# EAGLE board 14077-gatorBytes_button_board-Panel (EAGLE 9.1.0)
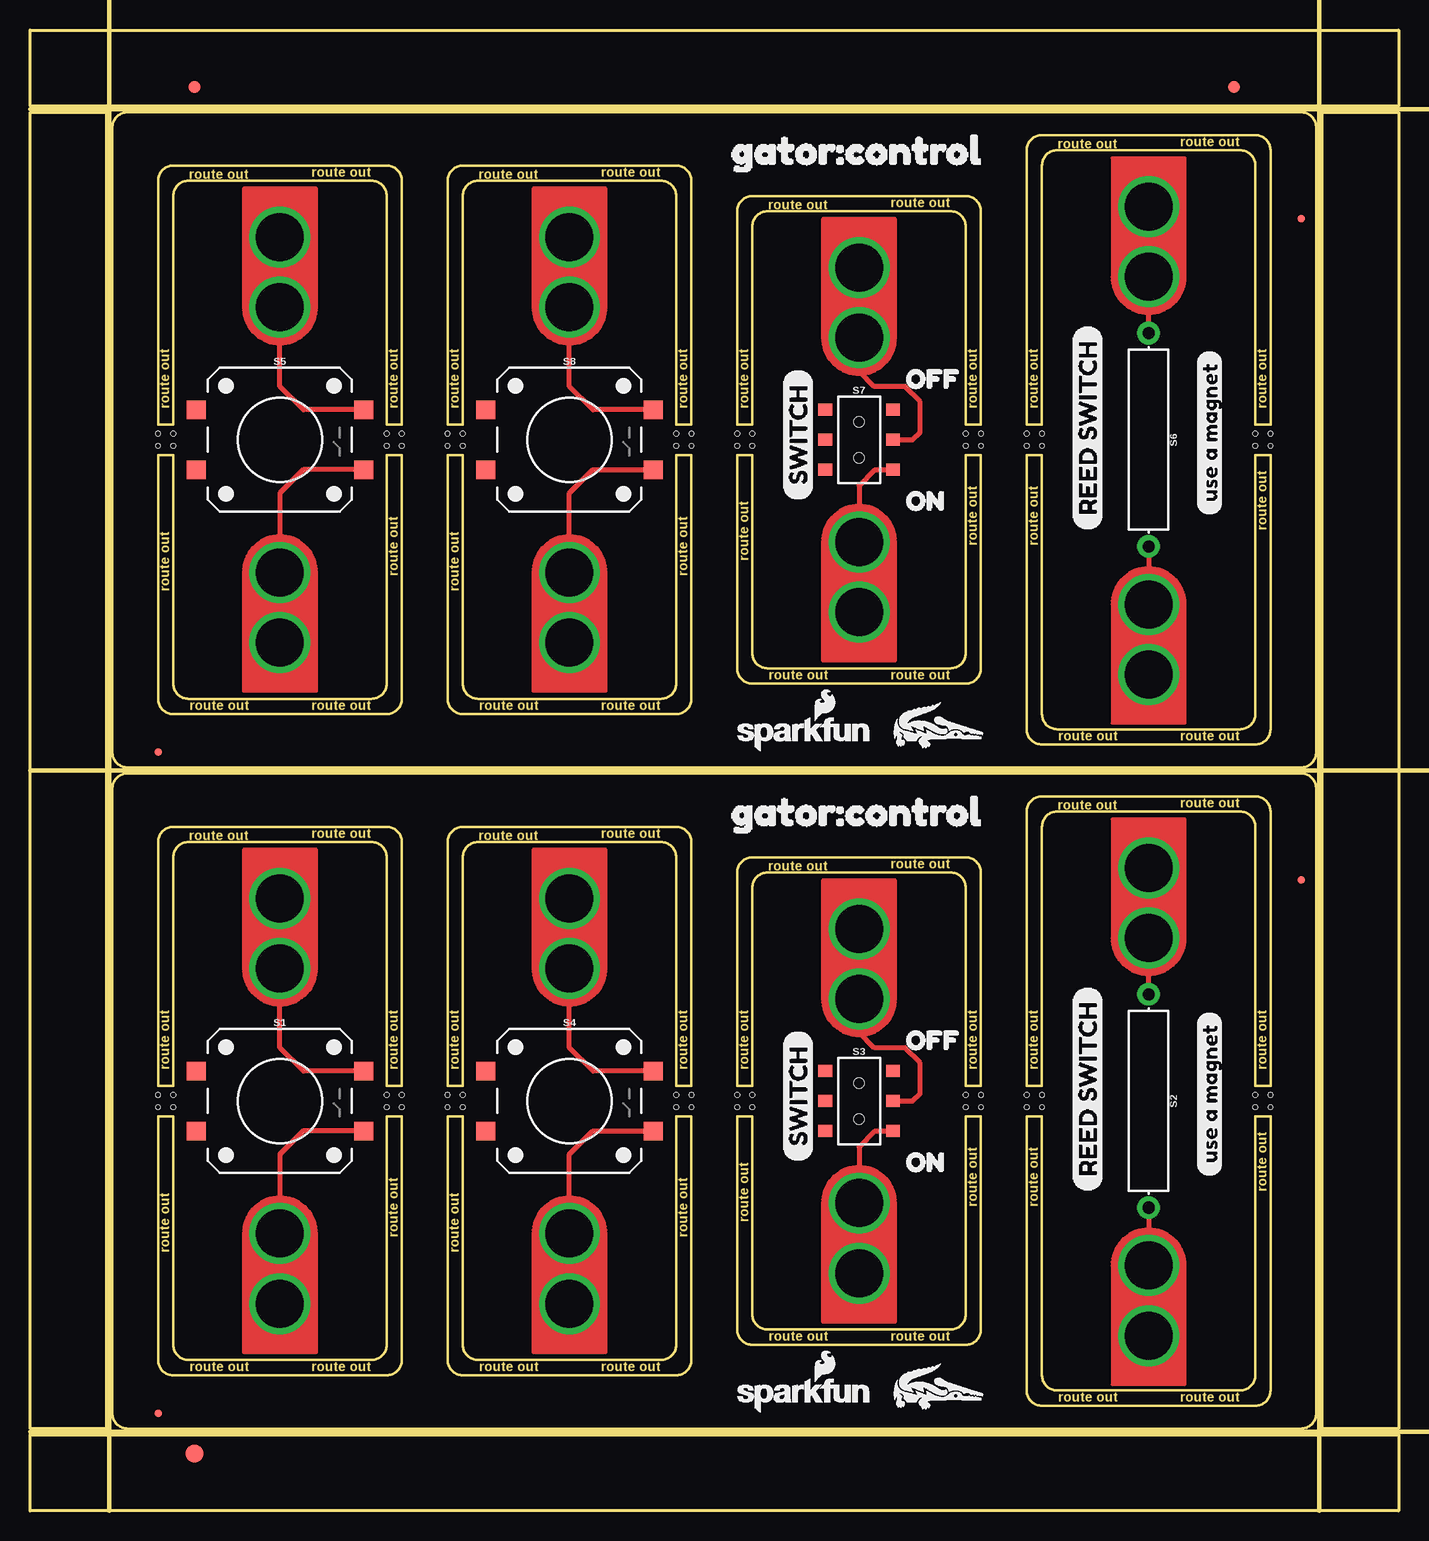
[diagram p0: board, top side]
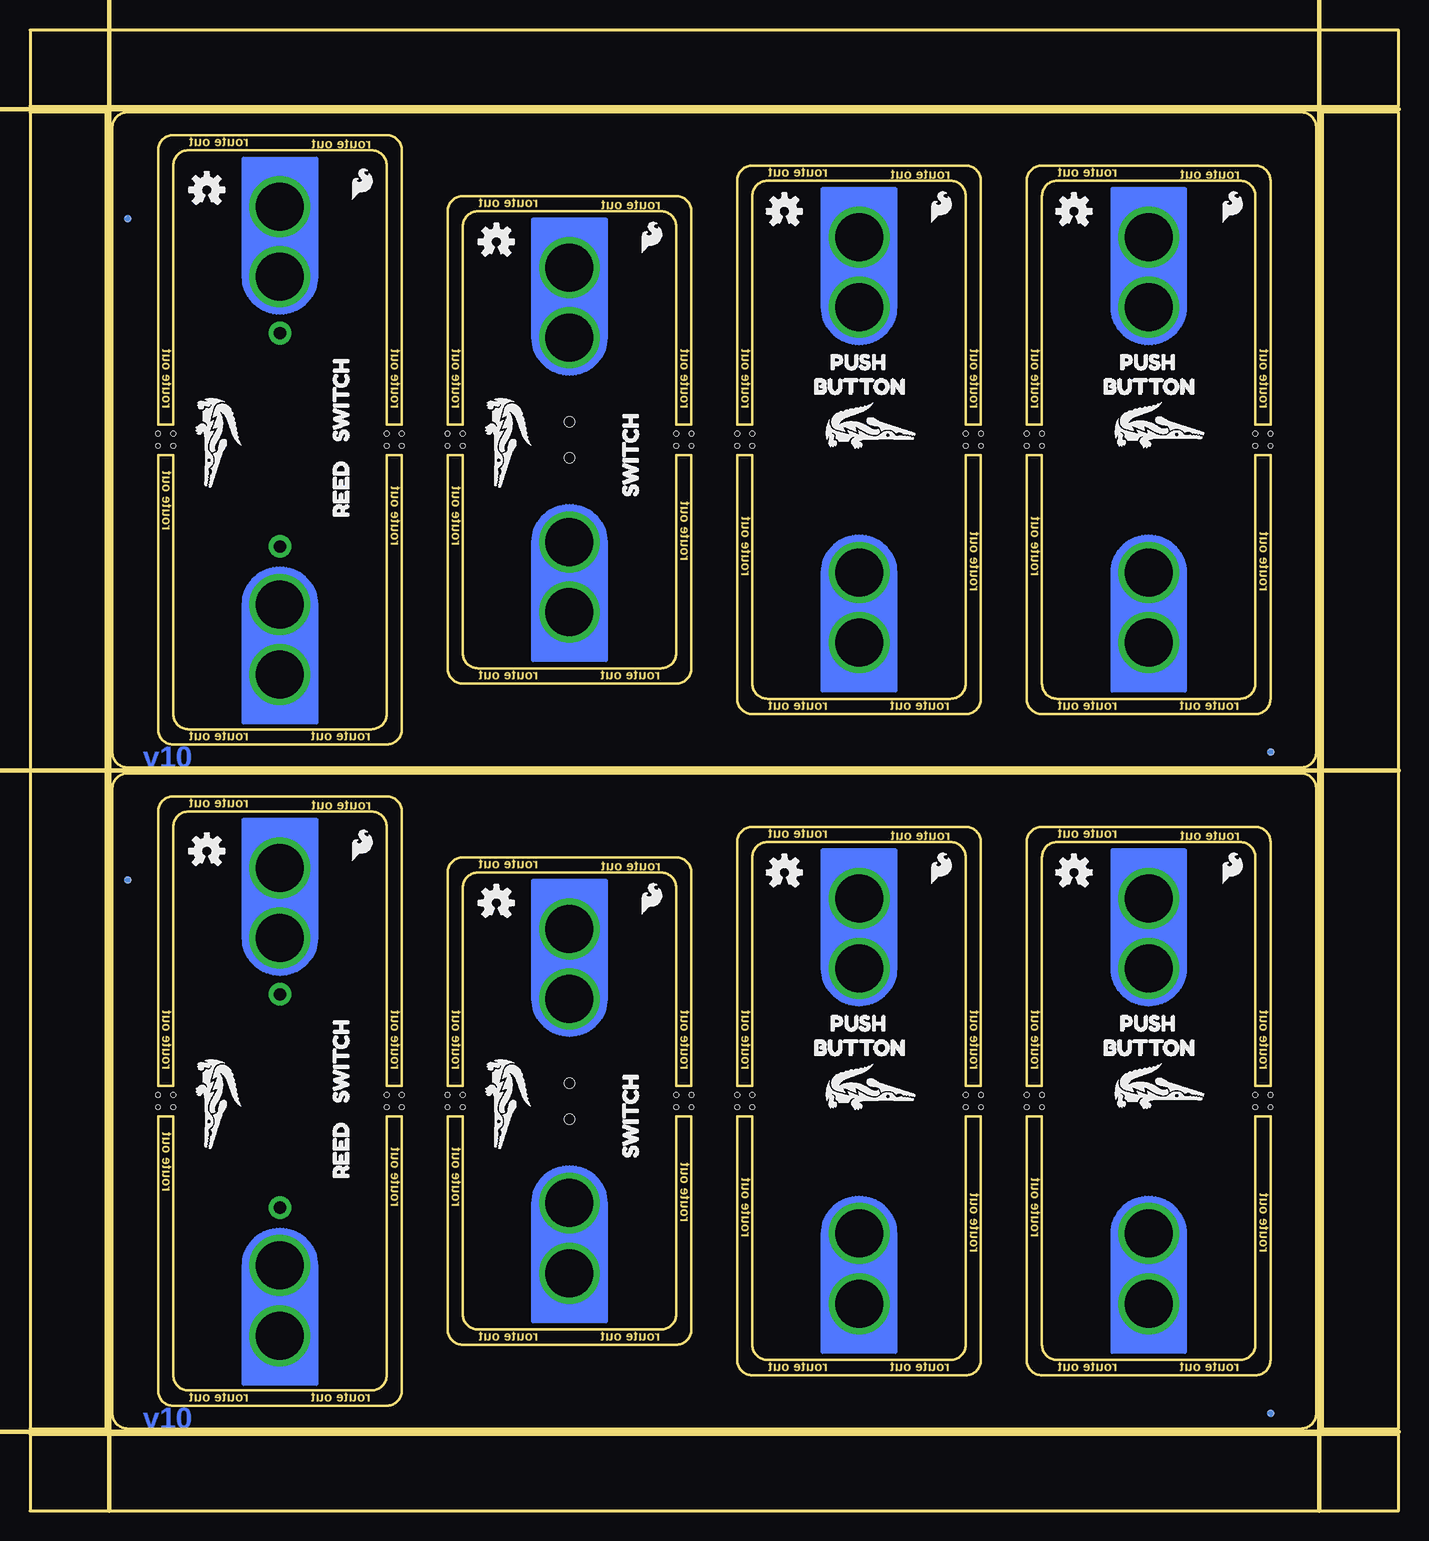
[diagram p1: board, bottom side, seen from below]

Size 114.05 x 123.44 mm. Coordinates in mm from the lower left corner, seen from the top.
Outline: 8.13,6.86 arc-90 6.86,8.13 6.86,60.2 arc-90 8.13,61.47 105.92,61.47 arc-90 107.19,60.2 107.19,8.13 arc-90 105.92,6.86 8.13,6.86
Outline: 28.45,55.75 arc-90 29.72,54.48 29.72,35.43 30.99,35.43 30.99,55.75 arc90 29.72,57.02 11.94,57.02 arc90 10.67,55.75 10.67,35.43 11.94,35.43 11.94,54.48 arc-90 13.21,55.75 28.45,55.75
Outline: 29.72,13.84 arc-90 28.45,12.57 13.21,12.57 arc-90 11.94,13.84 11.94,32.89 10.67,32.89 10.67,12.57 arc90 11.94,11.3 29.72,11.3 arc90 30.99,12.57 30.99,32.89 29.72,32.89 29.72,13.84
Outline: 52.58,55.75 arc-90 53.85,54.48 53.85,35.43 55.12,35.43 55.12,55.75 arc90 53.85,57.02 36.07,57.02 arc90 34.8,55.75 34.8,35.43 36.07,35.43 36.07,54.48 arc-90 37.34,55.75 52.58,55.75
Outline: 53.85,13.84 arc-90 52.58,12.57 37.34,12.57 arc-90 36.07,13.84 36.07,32.89 34.8,32.89 34.8,12.57 arc90 36.07,11.3 53.85,11.3 arc90 55.12,12.57 55.12,32.89 53.85,32.89 53.85,13.84
Outline: 76.71,53.21 arc-90 77.98,51.94 77.98,35.43 79.25,35.43 79.25,53.21 arc90 77.98,54.48 60.2,54.48 arc90 58.93,53.21 58.93,35.43 60.2,35.43 60.2,51.94 arc-90 61.47,53.21 76.71,53.21
Outline: 77.98,16.38 arc-90 76.71,15.11 61.47,15.11 arc-90 60.2,16.38 60.2,32.89 58.93,32.89 58.93,15.11 arc90 60.2,13.84 77.98,13.84 arc90 79.25,15.11 79.25,32.89 77.98,32.89 77.98,16.38
Outline: 100.84,58.29 arc-90 102.11,57.02 102.11,35.43 103.38,35.43 103.38,58.29 arc90 102.11,59.56 84.33,59.56 arc90 83.06,58.29 83.06,35.43 84.33,35.43 84.33,57.02 arc-90 85.6,58.29 100.84,58.29
Outline: 102.11,11.3 arc-90 100.84,10.03 85.6,10.03 arc-90 84.33,11.3 84.33,32.89 83.06,32.89 83.06,10.03 arc90 84.33,8.76 102.11,8.76 arc90 103.38,10.03 103.38,32.89 102.11,32.89 102.11,11.3
Outline: 8.13,61.98 arc-90 6.86,63.25 6.86,115.32 arc-90 8.13,116.59 105.92,116.59 arc-90 107.19,115.32 107.19,63.25 arc-90 105.92,61.98 8.13,61.98
Outline: 28.45,110.87 arc-90 29.72,109.6 29.72,90.55 30.99,90.55 30.99,110.87 arc90 29.72,112.14 11.94,112.14 arc90 10.67,110.87 10.67,90.55 11.94,90.55 11.94,109.6 arc-90 13.21,110.87 28.45,110.87
Outline: 29.72,68.96 arc-90 28.45,67.69 13.21,67.69 arc-90 11.94,68.96 11.94,88.01 10.67,88.01 10.67,67.69 arc90 11.94,66.42 29.72,66.42 arc90 30.99,67.69 30.99,88.01 29.72,88.01 29.72,68.96
Outline: 52.58,110.87 arc-90 53.85,109.6 53.85,90.55 55.12,90.55 55.12,110.87 arc90 53.85,112.14 36.07,112.14 arc90 34.8,110.87 34.8,90.55 36.07,90.55 36.07,109.6 arc-90 37.34,110.87 52.58,110.87
Outline: 53.85,68.96 arc-90 52.58,67.69 37.34,67.69 arc-90 36.07,68.96 36.07,88.01 34.8,88.01 34.8,67.69 arc90 36.07,66.42 53.85,66.42 arc90 55.12,67.69 55.12,88.01 53.85,88.01 53.85,68.96
Outline: 76.71,108.33 arc-90 77.98,107.06 77.98,90.55 79.25,90.55 79.25,108.33 arc90 77.98,109.6 60.2,109.6 arc90 58.93,108.33 58.93,90.55 60.2,90.55 60.2,107.06 arc-90 61.47,108.33 76.71,108.33
Outline: 77.98,71.5 arc-90 76.71,70.23 61.47,70.23 arc-90 60.2,71.5 60.2,88.01 58.93,88.01 58.93,70.23 arc90 60.2,68.96 77.98,68.96 arc90 79.25,70.23 79.25,88.01 77.98,88.01 77.98,71.5
Outline: 100.84,113.41 arc-90 102.11,112.14 102.11,90.55 103.38,90.55 103.38,113.41 arc90 102.11,114.68 84.33,114.68 arc90 83.06,113.41 83.06,90.55 84.33,90.55 84.33,112.14 arc-90 85.6,113.41 100.84,113.41
Outline: 102.11,66.42 arc-90 100.84,65.15 85.6,65.15 arc-90 84.33,66.42 84.33,88.01 83.06,88.01 83.06,65.15 arc90 84.33,63.88 102.11,63.88 arc90 103.38,65.15 103.38,88.01 102.11,88.01 102.11,66.42
Outline: 0,6.35 114.05,6.35 114.05,0 0,0 0,6.35
Outline: 107.7,116.59 114.05,116.59 114.05,6.86 107.7,6.86 107.7,116.59
Outline: 0,123.44 114.05,123.44 114.05,117.09 0,117.09 0,123.44
Outline: 0,116.59 6.35,116.59 6.35,6.86 0,6.86 0,116.59
Copper layers (1*16): Top 0.035mm / dielectric 1.5mm / Bottom 0.035mm
Design rules "SparkFun-2-layer-PCBWay-LIMIT": minimum track width 6mil, minimum drill 0.3mm, track to track 6mil, track to pad 6mil, pad to pad 6mil, via to via 6mil, smd to smd 6mil, copper to edge 6mil, drill to drill 6mil, minimum pad ring 6mil, minimum via ring 6mil, stop-mask expansion 4mil, vias tented up to drill 25mil, thermal gap 10mil
Holes 0.38 mm at 102.11,34.67 102.11,33.66 84.33,33.66 84.33,34.67 60.2,33.66 60.2,34.67 53.85,33.66 53.85,34.67 36.07,33.66 36.07,34.67 29.72,33.66 29.72,34.67 11.94,33.66 11.94,34.67 34.8,34.67 34.8,33.66 30.99,34.67 30.99,33.66 10.67,34.67 10.67,33.66 55.12,34.67 55.12,33.66 58.93,34.67 58.93,33.66 83.06,34.67 79.25,34.67 77.98,34.67 83.06,33.66 79.25,33.66 77.98,33.66 103.38,34.67 103.38,33.66 102.11,89.79 102.11,88.77 84.33,88.77 84.33,89.79 60.2,88.77 60.2,89.79 53.85,88.77 53.85,89.79 36.07,88.77 36.07,89.79 29.72,88.77 29.72,89.79 11.94,88.77 11.94,89.79 34.8,89.79 34.8,88.77 30.99,89.79 30.99,88.77 10.67,89.79 10.67,88.77 55.12,89.79 55.12,88.77 58.93,89.79 58.93,88.77 83.06,89.79 79.25,89.79 77.98,89.79 83.06,88.77 79.25,88.77 77.98,88.77 103.38,89.79 103.38,88.77
Milling: 5 lines

## Footprints (pad centres in the part's own frame; a part is rotated, then mirrored left to right if it is on the bottom)
FIDUCIAL-1X2 = smd 1 x 1: 1 0,0
FIDUCIAL-1.5X3 = smd 1.5 x 1.5: 1 0,0
FIDUCIAL-MICRO = smd 0.635 x 0.635: 1 0,0
TACTILE_SWITCH_SMD_12MM = smd 1.6 x 1.55: 1 6.975,-2.5; 2 -6.975,-2.5; 3 6.975,2.5; 4 -6.975,2.5
REED_SWITCH_PLASTIC = drill 1.016 pad 1.88: P$1 -8.89,0; P$2 8.89,0
SWITCH_DPDT_SMD_AYZ0202 = smd 1 x 1.15: 1 -2.5,2.825; 2 0,2.825; 3 2.5,2.825; 4 -2.5,-2.825; 5 0,-2.825; 6 2.5,-2.825 | hole 0.85: 1.5,0; -1.5,0
GATOR = drill 4 pad 5.08: P$1 0,-6.096; P$2 0,-0.254

## Placement (x,y rotation side)
E$1  [FIDUCIAL-1X2]  13.72,118.68 0 top
E$2  [FIDUCIAL-1X2]  100.33,118.68 0 top
E$3  [FIDUCIAL-1.5X3]  13.72,4.76 0 top
FD1  FIDUCIALUFIDUCIAL  [FIDUCIAL-MICRO]  105.92,52.58 0 top
FD2  FIDUCIALUFIDUCIAL  [FIDUCIAL-MICRO]  105.92,52.58 0 bottom
FD3  FIDUCIALUFIDUCIAL  [FIDUCIAL-MICRO]  10.67,8.13 0 bottom
FD4  FIDUCIALUFIDUCIAL  [FIDUCIAL-MICRO]  10.67,8.13 0 top
FD5  FIDUCIALUFIDUCIAL  [FIDUCIAL-MICRO]  105.92,107.7 0 top
FD6  FIDUCIALUFIDUCIAL  [FIDUCIAL-MICRO]  105.92,107.7 0 bottom
FD7  FIDUCIALUFIDUCIAL  [FIDUCIAL-MICRO]  10.67,63.25 0 bottom
FD8  FIDUCIALUFIDUCIAL  [FIDUCIAL-MICRO]  10.67,63.25 0 top
LOGO1  SFE_LOGO_FLAME.1_INCH  [SFE_LOGO_FLAME_.1]  63.37,49.4 0 bottom
LOGO2  OSHW-LOGOS  [OSHW-LOGO-S]  75.18,50.67 0 bottom
LOGO3  OSHW-LOGOS  [OSHW-LOGO-S]  51.18,53.21 0 bottom
LOGO4  SFE_LOGO_FLAME.1_INCH  [SFE_LOGO_FLAME_.1]  39.24,51.94 0 bottom
LOGO5  OSHW-LOGOS  [OSHW-LOGO-S]  27.05,53.21 0 bottom
LOGO6  SFE_LOGO_FLAME.1_INCH  [SFE_LOGO_FLAME_.1]  14.99,51.94 0 bottom
LOGO7  SFE_LOGO_FLAME.1_INCH  [SFE_LOGO_FLAME_.1]  87.5,53.85 0 bottom
LOGO8  OSHW-LOGOS  [OSHW-LOGO-S]  99.31,54.99 0 bottom
LOGO9  SFE_LOGO_FLAME.1_INCH  [SFE_LOGO_FLAME_.1]  63.37,104.52 0 bottom
LOGO10  OSHW-LOGOS  [OSHW-LOGO-S]  75.18,105.79 0 bottom
LOGO11  OSHW-LOGOS  [OSHW-LOGO-S]  51.18,108.33 0 bottom
LOGO12  SFE_LOGO_FLAME.1_INCH  [SFE_LOGO_FLAME_.1]  39.24,107.06 0 bottom
LOGO13  OSHW-LOGOS  [OSHW-LOGO-S]  27.05,108.33 0 bottom
LOGO14  SFE_LOGO_FLAME.1_INCH  [SFE_LOGO_FLAME_.1]  14.99,107.06 0 bottom
LOGO15  SFE_LOGO_FLAME.1_INCH  [SFE_LOGO_FLAME_.1]  87.5,108.97 0 bottom
LOGO16  OSHW-LOGOS  [OSHW-LOGO-S]  99.31,110.11 0 bottom
S1  MOMENTARY-SWITCH-SPST-SMD-12MM  [TACTILE_SWITCH_SMD_12MM]  20.83,34.16 0 top
S2  REED_SWITCH-PTH-INSULATED  [REED_SWITCH_PLASTIC]  93.22,34.16 270 top
S3  [SWITCH_DPDT_SMD_AYZ0202]  69.09,34.16 270 top
S4  MOMENTARY-SWITCH-SPST-SMD-12MM  [TACTILE_SWITCH_SMD_12MM]  44.96,34.16 0 top
S5  MOMENTARY-SWITCH-SPST-SMD-12MM  [TACTILE_SWITCH_SMD_12MM]  20.83,89.28 0 top
S6  REED_SWITCH-PTH-INSULATED  [REED_SWITCH_PLASTIC]  93.22,89.28 270 top
S7  [SWITCH_DPDT_SMD_AYZ0202]  69.09,89.28 270 top
S8  MOMENTARY-SWITCH-SPST-SMD-12MM  [TACTILE_SWITCH_SMD_12MM]  44.96,89.28 0 top
U$1  [GATOR#PNG]  98.23,34.23 270 bottom
U$2  [BUTTON3]  25.78,38.61 0 bottom
U$3  [PUSH4]  24.38,40.64 0 bottom
U$4  [PUSH4]  48.51,40.64 0 bottom
U$5  [BUTTON3]  49.91,38.61 0 bottom
U$6  [OFF9]  71.63,39.24 0 top
U$7  [REED_SWITCH0]  88.14,26.54 90 top
U$8  [SWITCH2]  64.01,29.08 90 top
U$9  [USE_A_MAGNET10]  98.3,27.81 90 top
U$10  GATOR  [GATOR]  44.96,44.96 180 top
U$11  GATOR  [GATOR]  20.83,44.96 180 top
U$12  GATOR  [GATOR]  93.22,20.7 0 top
U$13  [ON8]  71.63,29.08 0 top
U$14  GATOR  [GATOR]  69.09,25.91 0 top
U$15  GATOR  [GATOR]  69.09,42.42 180 top
U$16  GATOR  [GATOR]  93.22,47.5 180 top
U$17  GATOR  [GATOR]  20.83,23.37 0 top
U$18  [SWITCH5]  64.01,28.32 90 bottom
U$19  GATOR  [GATOR]  44.96,23.37 0 top
U$20  [REED6]  88.14,26.54 90 bottom
U$21  [SWITCH5]  88.14,32.89 90 bottom
U$22  [GATOR#PNG]  75.37,10.48 0 top
U$23  [GATOR#CONTROL0]  56.39,58.29 0 top
U$24  [SFE_LOGO_NAME_FLAME_.1]  58.55,8.13 0 top
U$25  [GATOR#PNG]  20.26,90.61 0 bottom
U$26  [GATOR#PNG]  44.32,90.55 0 bottom
U$27  [GATOR#PNG]  74.1,89.34 270 bottom
U$28  [GATOR#PNG]  44.32,35.43 0 bottom
U$29  [GATOR#PNG]  74.1,34.23 270 bottom
U$30  GATOR  [GATOR]  44.96,100.08 180 top
U$31  GATOR  [GATOR]  20.83,100.08 180 top
U$32  GATOR  [GATOR]  93.22,75.82 0 top
U$33  GATOR  [GATOR]  69.09,81.03 0 top
U$34  GATOR  [GATOR]  69.09,97.54 180 top
U$35  GATOR  [GATOR]  93.22,102.62 180 top
U$36  GATOR  [GATOR]  20.83,78.49 0 top
U$37  GATOR  [GATOR]  44.96,78.49 0 top
U$38  [GATOR#PNG]  98.23,89.34 270 bottom
U$39  [BUTTON3]  25.78,93.73 0 bottom
U$40  [PUSH4]  24.38,95.76 0 bottom
U$41  [PUSH4]  48.51,95.76 0 bottom
U$42  [BUTTON3]  49.91,93.73 0 bottom
U$43  [REED_SWITCH0]  88.14,81.66 90 top
U$44  [SWITCH2]  64.01,84.2 90 top
U$45  [USE_A_MAGNET10]  98.3,82.93 90 top
U$46  [OFF9]  71.63,94.36 0 top
U$47  [ON8]  71.63,84.2 0 top
U$48  [SWITCH5]  64.01,83.44 90 bottom
U$49  [REED6]  88.14,81.66 90 bottom
U$50  [SWITCH5]  88.14,88.01 90 bottom
U$51  [GATOR#PNG]  75.37,65.6 0 top
U$52  [GATOR#CONTROL0]  56.39,113.41 0 top
U$53  [SFE_LOGO_NAME_FLAME_.1]  58.55,63.25 0 top
U$70  [GATOR#PNG]  20.26,35.5 0 bottom

## Library data of the parts
E$1 E$2 FD1-FD8 LOGO1-LOGO16 U$24 U$53 = SparkFun-Aesthetics
E$3 = SparkFun-Retired
S1 S4 S5 S8 = SparkFun-Switches; PROD_ID: SWCH-11967; SF_SKU: COM-12993
S2 S6 = SparkFun-Switches; PROD_ID: SWCH-10467; SF_SKU: COM-10601
S3 S7 = SparkFun-Switches; PROD_ID: SWCH-08179; SF_ID: COM-00597
U$1 U$22 U$25-U$29 U$38 U$51 U$70 = gator#PNG (6)
U$2-U$9 U$13 U$18 U$20 U$21 U$39-U$50 = buzzard_labels (3)
U$10-U$12 U$14-U$17 U$19 U$30-U$37 = SparkFun-Connectors
U$23 U$52 = buzzard_labels (5)

## Nets
N$1: S4.1 U$19.P$1 U$19.P$2
N$2: S4.3 U$10.P$1 U$10.P$2
N$3: S1.1 U$17.P$1 U$17.P$2
N$4: S1.3 U$11.P$1 U$11.P$2
N$5: S2.P$1 U$16.P$1 U$16.P$2
N$6: S2.P$2 U$12.P$1 U$12.P$2
N$7: S3.2 U$15.P$1 U$15.P$2
N$8: S3.1
N$9: S3.3 U$14.P$1 U$14.P$2
N$10: S8.1 U$37.P$1 U$37.P$2
N$11: S8.3 U$30.P$1 U$30.P$2
N$12: S5.1 U$36.P$1 U$36.P$2
N$13: S5.3 U$31.P$1 U$31.P$2
N$14: S6.P$1 U$35.P$1 U$35.P$2
N$15: S6.P$2 U$32.P$1 U$32.P$2
N$16: S7.2 U$34.P$1 U$34.P$2
N$17: S7.1
N$18: S7.3 U$33.P$1 U$33.P$2

## Tracks (layer width: path | path; a pad name or v marks a point on that pad's centre or on a via)
N$1
  Top 0.203: U$19.P$2 U$19.P$1
  Top 0.406: U$19.P$2 44.96,29.72 46.9,31.66 S4.1
N$2
  Top 0.203: U$10.P$1 44.96,44.96 U$10.P$2
  Top 0.406: U$10.P$1 44.96,49.62 | S4.3 46.9,36.66 44.96,38.61 44.96,44.96
N$3
  Top 0.203: U$17.P$2 U$17.P$1
  Top 0.406: S1.1 22.77,31.66 20.83,29.72 U$17.P$2
N$4
  Top 0.203: U$11.P$1 20.83,44.96 U$11.P$2
  Top 0.406: S1.3 22.77,36.66 20.83,38.61 20.83,44.96
N$5
  Top 0.203: U$16.P$2 93.22,47.5
  Top 0.406: 93.22,46.23 93.22,47.5 | 93.22,47.5 U$16.P$1 | S2.P$1 93.22,47.5
N$6
  Top 0.406: S2.P$2 93.22,22.1 | 93.22,22.1 U$12.P$1 | U$12.P$2 93.22,22.1
N$7
  Top 0.203: 69.09,39.88 U$15.P$1 69.09,45.85 68.83,45.59
  Top 0.406: 67.82,45.59 68.83,45.59 68.96,45.59 68.97,45.59 | S3.2 73.53,34.16 74.17,34.8 74.17,37.34 72.9,38.61 70.36,38.61 69.09,39.88 U$15.P$2
N$9
  Top 0.406: S3.3 71.87,31.62 70.36,31.62 69.09,30.35 69.09,24.64 U$14.P$2 U$14.P$1
N$10
  Top 0.203: U$37.P$2 U$37.P$1
  Top 0.406: U$37.P$2 44.96,84.84 46.9,86.78 S8.1
N$11
  Top 0.203: U$30.P$1 44.96,100.08 U$30.P$2
  Top 0.406: U$30.P$1 44.96,104.74 | S8.3 46.9,91.78 44.96,93.73 44.96,100.08
N$12
  Top 0.203: U$36.P$2 U$36.P$1
  Top 0.406: S5.1 22.77,86.78 20.83,84.84 U$36.P$2
N$13
  Top 0.203: U$31.P$1 20.83,100.08 U$31.P$2
  Top 0.406: S5.3 22.77,91.78 20.83,93.73 20.83,100.08
N$14
  Top 0.203: U$35.P$2 93.22,102.62
  Top 0.406: 93.22,101.35 93.22,102.62 | 93.22,102.62 U$35.P$1 | S6.P$1 93.22,102.62
N$15
  Top 0.406: S6.P$2 93.22,77.22 | 93.22,77.22 U$32.P$1 | U$32.P$2 93.22,77.22
N$16
  Top 0.203: 69.09,95 U$34.P$1 69.09,100.97 68.83,100.71
  Top 0.406: 67.82,100.71 68.83,100.71 68.96,100.71 68.97,100.71 | S7.2 73.53,89.28 74.17,89.92 74.17,92.46 72.9,93.73 70.36,93.73 69.09,95 U$34.P$2
N$18
  Top 0.406: S7.3 71.87,86.74 70.36,86.74 69.09,85.47 69.09,79.76 U$33.P$2 U$33.P$1

## Text on the board
Bottom: v10 | v10
Dimension: route out | route out | route out | route out | route out | route out | route out | route out | route out | route out | route out | route out | route out | route out | route out | route out | route out | route out | route out | route out | route out | route out | route out | route out | route out | route out | route out | route out | route out | route out | route out | route out | route out | route out | route out | route out | route out | route out | route out | route out | route out | route out | route out | route out | route out | route out | route out | route out | route out | route out | route out | route out | route out | route out | route out | route out | route out | route out | route out | route out | route out | route out | route out | route out
Milling: v-score | v-score | v-score | v-score | v-score